# Altium PCB FPGA-DemoShield-PCB.PcbDoc
Units mm, origin at the board's own origin, x right, y up, seen from the top; angles counter-clockwise.
Board outline 55 x 70 mm, 2 copper layers (Top Layer, Bottom Layer); 14 components, 14 nets, 119 pads, 0 vias.
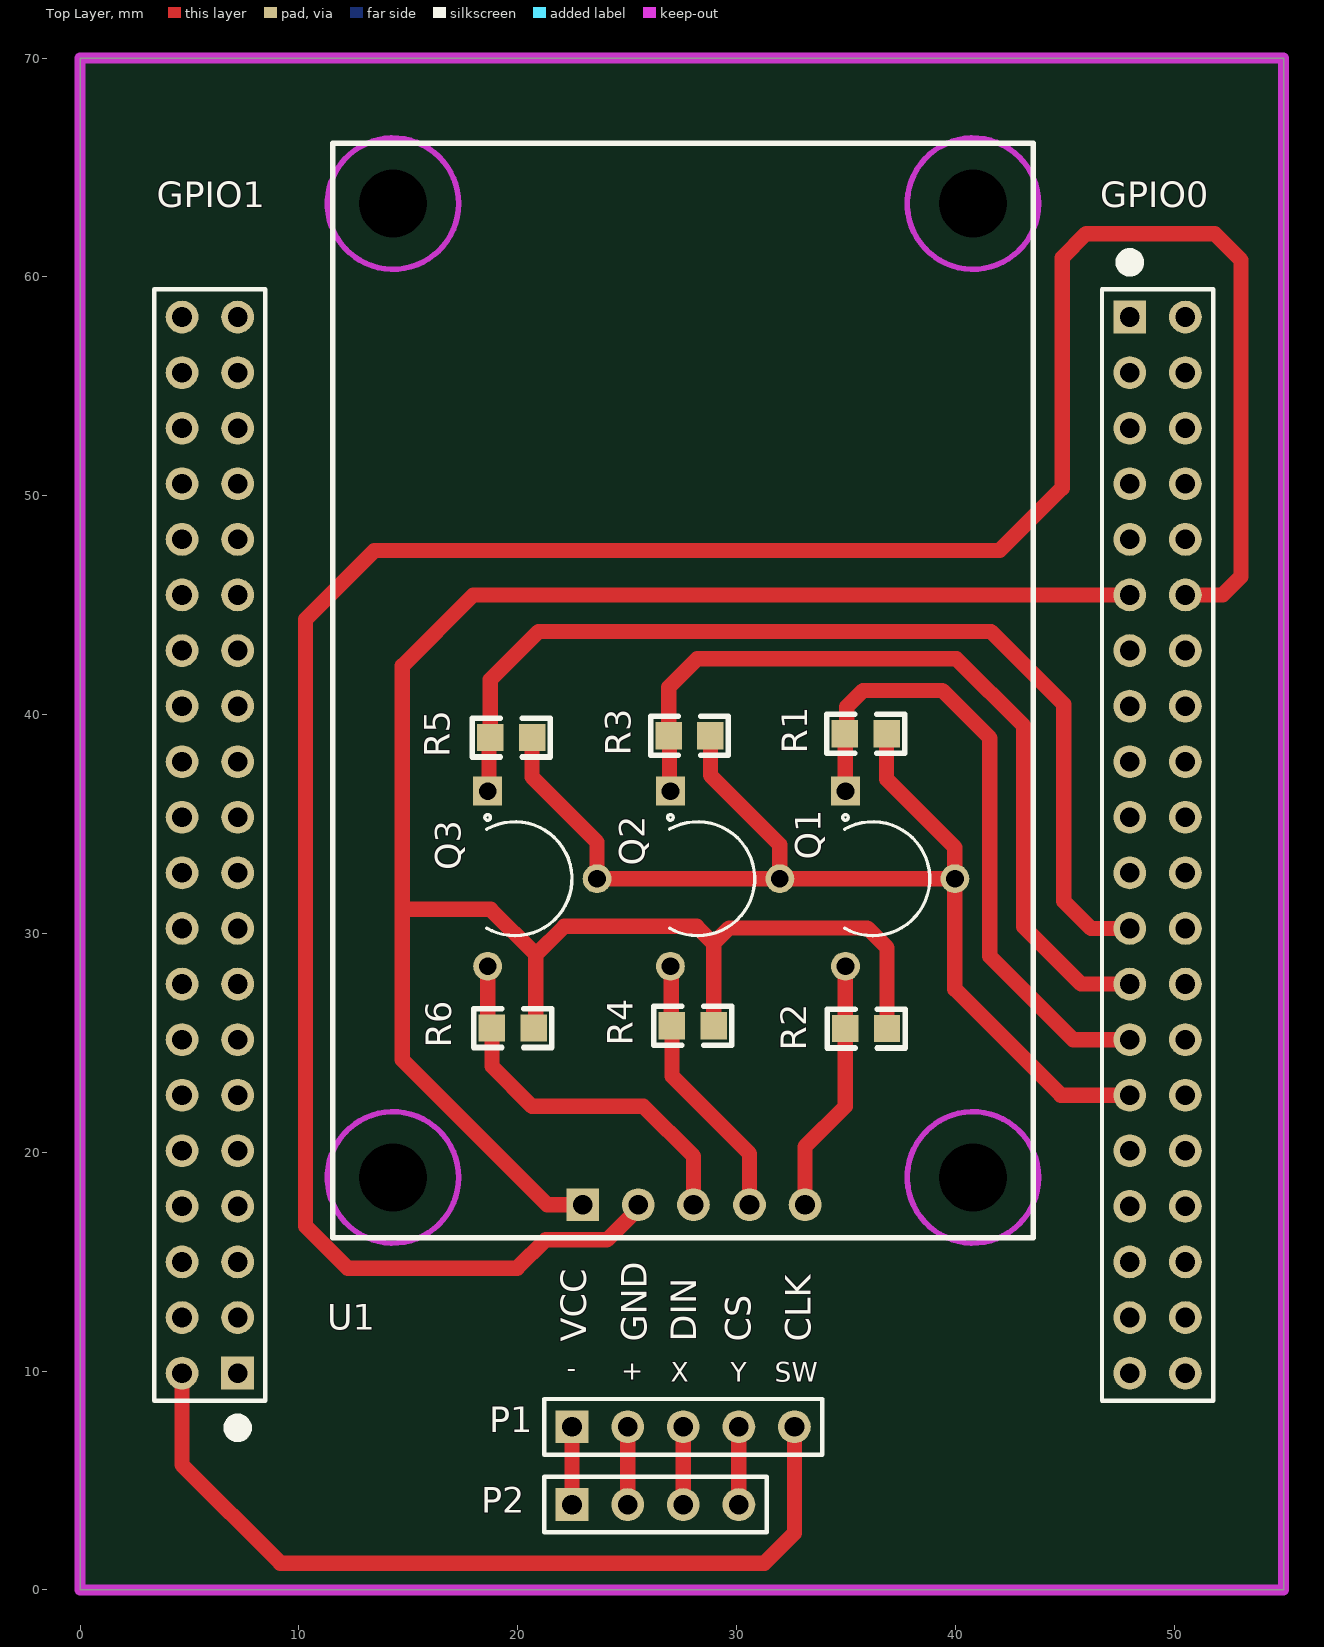
[diagram p0: Top Layer view]
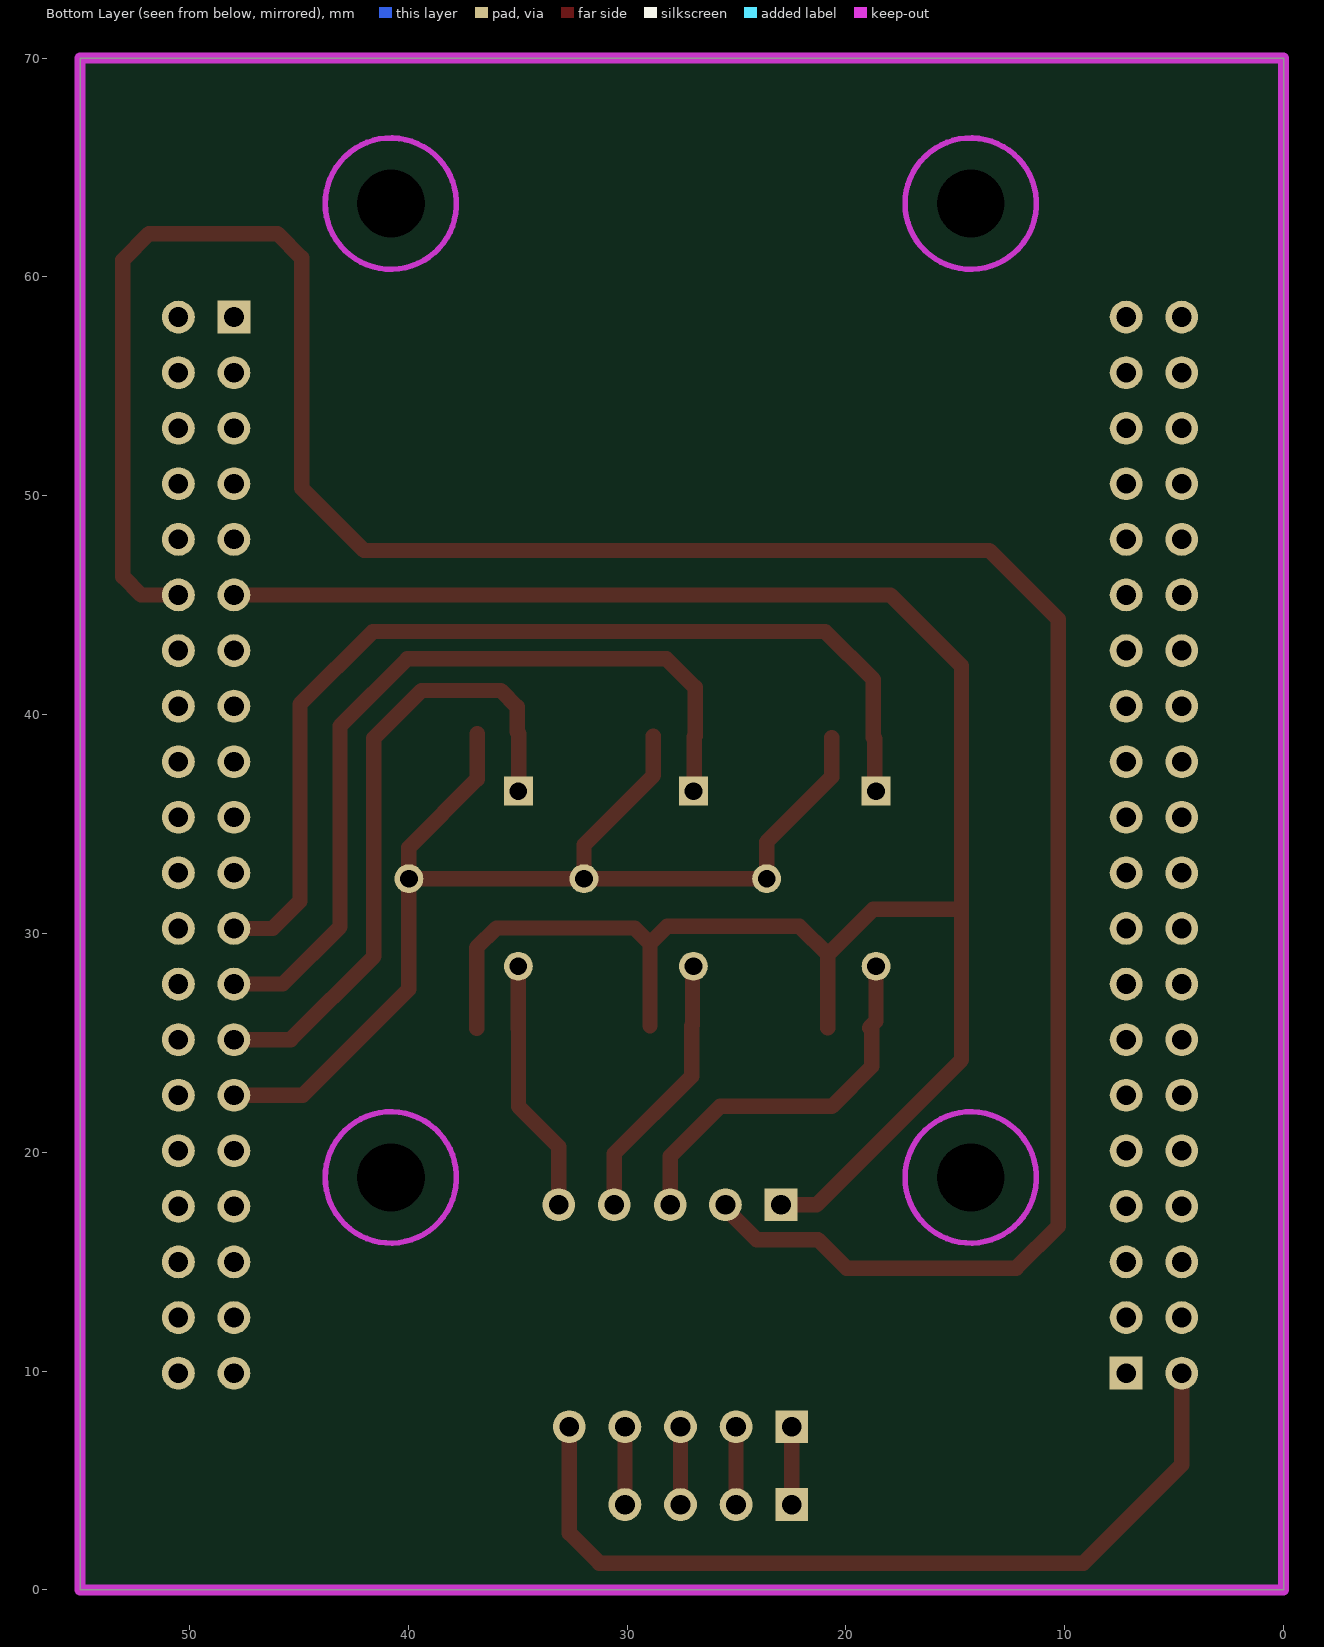
[diagram p1: Bottom Layer view, seen from below]
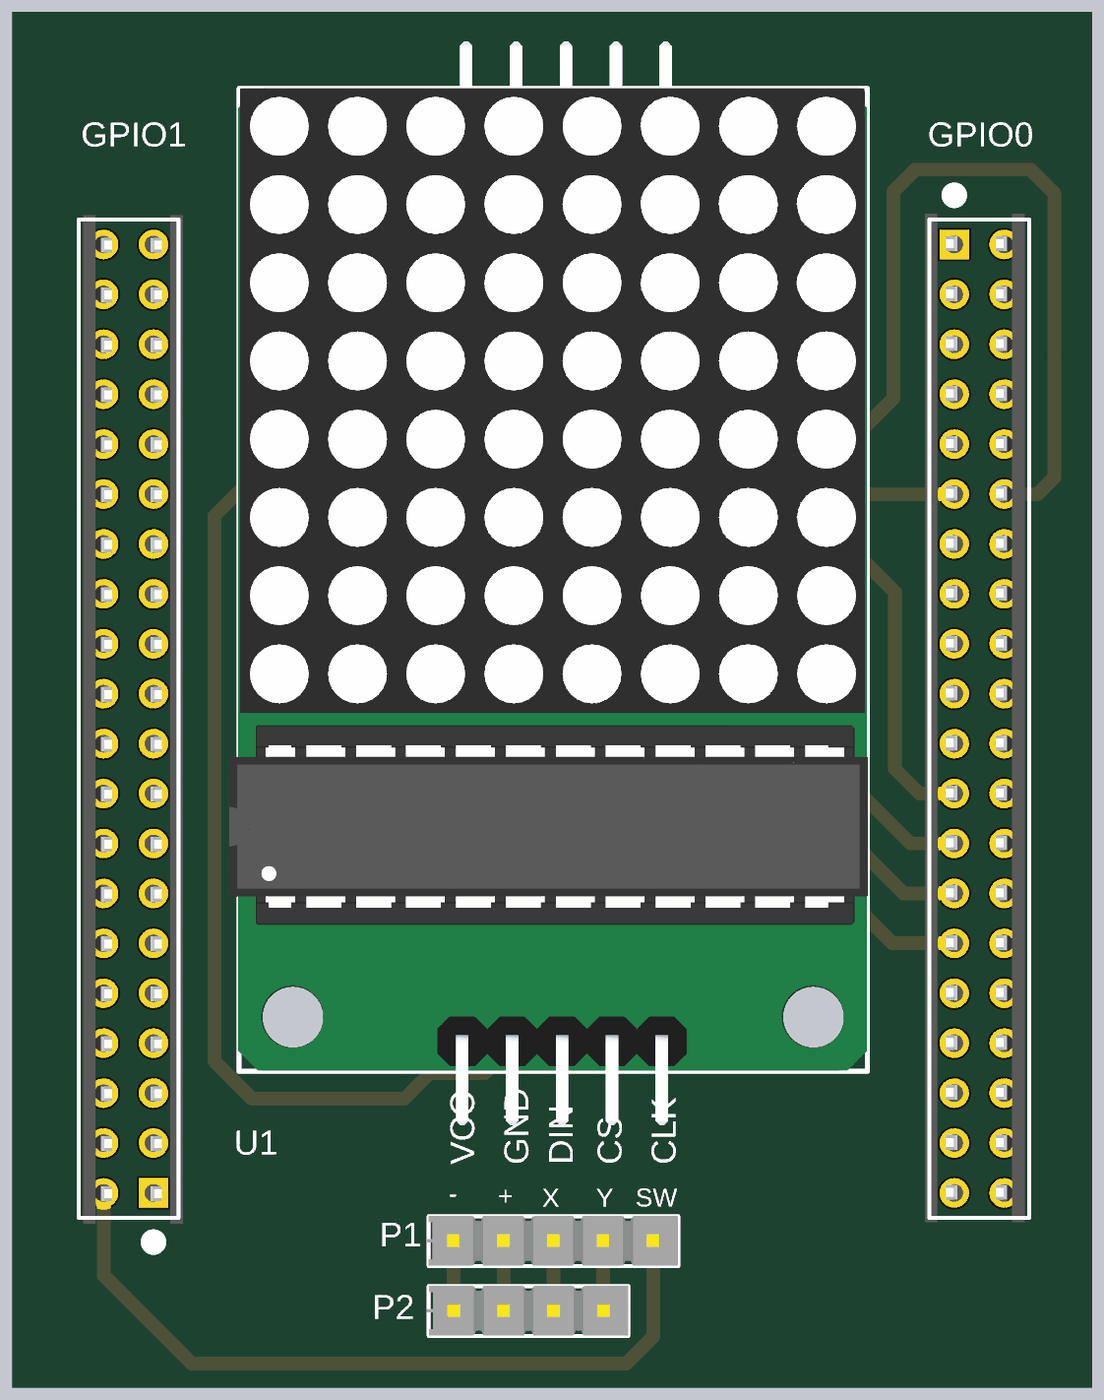
[diagram p2: 3D render of the assembled board from above, using the file's embedded part models]

## Layer stack, top to bottom
Top Solder: solder mask 0.0102, Solder Resist, Dk 3.5
Top Layer: signal copper 0.0356
Dielectric 1: dielectric 0.32, FR-4, Dk 4.8
Bottom Layer: signal copper 0.0356
Bottom Solder: solder mask 0.0102, Solder Resist, Dk 3.5

## Board outline
0,0 55,0 55,70 0,70

## Design rules (kind name [scope] priority, off if disabled: settings)
Clearance [All] p1: gap=0.5 ignorepadtopadclearanceinfootprint=FALSE
HoleSize [All] p1: absolutevalues=TRUE maxlimit=10 minlimit=0.025 maxpercent=80.000 minpercent=20.000
PolygonConnect [All] p1: connectstyle=Relief reliefconductorwidth=0.254 reliefentries=4 polygonreliefangle="90 Angle" airgapwidth=0.254
RoomDefinition FPGA-DemoShield-Schematic [InComponentClass('FPGA-DemoShield-Schematic')] p1: confinementstyle=ConfineIn formatcopy=TRUE lockcomponents=FALSE outline 3.015,2.259 52.14,2.259 52.14,68.759 3.015,68.759
RoutingVias [All] p1: holewidth=0.711 width=1.27 viastyle="Through Hole" minholewidth=0.711 minwidth=1.27 maxholewidth=0.711 maxwidth=1.27
SilkToSolderMaskClearance [IsPad] p1: minsilkscreentomaskgap=0 clearancetoexposedcopper=TRUE
SolderMaskExpansion [All] p1: expansion=0.102 istentingtop=FALSE
Width [All] p1: maxlimit=0.7 minlimit=0.5 preferedwidth=0.7
28 further rules are at their usual default settings.

## Components (designator, comment, footprint, x,y, rotation, side; value= is the part's Value field where it differs from the comment)
GPIO0 "HEADER_FEMALE_20X2" HDR2X20_FEMALE 47.968,58.166 r270 top
GPIO1 "HEADER_FEMALE_20X2" HDR2X20_FEMALE 7.199,9.906 r90 top
P1 "JOYSTICK_MALE_PINS" HDR1X5_MALE 22.483,7.454 r0 top
P2 "FPGA_ANALOG_PINS" HDR1X4_MALE 22.483,3.898 r0 top
Q1 "2N7000" 2N7000-TO-92 34.975,32.5 r270 top
Q2 "2N7000" 2N7000-TO-92 26.975,32.5 r270 top
Q3 "2N7000" 2N7000-TO-92 18.625,32.5 r270 top
R1 "RES_1k_0805" RES_0805 35.9,39.125 r0 top value=1kΩ
R2 "RES_1k_0805" RES_0805 35.92,25.654 r0 top value=1kΩ
R3 "RES_1k_0805" RES_0805 27.85,39.025 r0 top value=1kΩ
R4 "RES_1k_0805" RES_0805 28.001,25.779 r0 top value=1kΩ
R5 "RES_1k_0805" RES_0805 19.7,38.95 r0 top value=1kΩ
R6 "RES_1k_0805" RES_0805 19.775,25.675 r0 top value=1kΩ
U1 "MAX7219_LEDMatrix" LED_MATRIX 40.8,18.85 r90 top

## Footprints (in the part's own frame and the unit in brackets; to place one, negate y for a bottom-side part, rotate by r counter-clockwise, add the part's x,y. Pads: shape width x height; smd on the part's side, far side on the other; paste and mask are expansions set on the pad)
2N7000-TO-92 [mil]
  rect 52x52 hole 32 mask+0: 1(-157.48,0)
  round 52 hole 32 mask+0: 2(0,196.85) 3(157.48,0)
  silkscreen extent -115,-5 102,152, body extent -97,-12 97,147, height 194
HDR1X4_MALE [mm] "Connector; Header; 4 Position"
  rect 1.5x1.5 hole 0.9: 1(0,0)
  round 1.5 hole 0.9: 2(2.54,0) 3(5.08,0) 4(7.62,0)
  silkscreen extent -1.27,-1.27 8.89,1.27, body extent -1.39,-1.25 8.89,1.29, height 5.21
HDR1X5_MALE [mm] "Connector; Header; 5 Position"
  rect 1.5x1.5 hole 0.9: 1(0,0)
  round 1.5 hole 0.9: 2(2.54,0) 3(5.08,0) 4(7.62,0) 5(10.16,0)
  silkscreen extent -1.27,-1.27 11.43,1.27, body extent -1.41,-1.25 11.41,1.29, height 5.21
HDR2X20_FEMALE [mm] "Connector; Header; 20x2 Position"
  rect 1.5x1.5 hole 0.9: 1(0,0)
  round 1.5 hole 0.9: 2(0,2.54) 3(2.54,0) 4(2.54,2.54) 5(5.08,0) 6(5.08,2.54) 7(7.62,0) 8(7.62,2.54) 9(10.16,0) 10(10.16,2.54) 11(12.7,0) 12(12.7,2.54) 13(15.24,0) 14(15.24,2.54) 15(17.78,0) 16(17.78,2.54) 17(20.32,0) 18(20.32,2.54) 19(22.86,0) 20(22.86,2.54) 21(25.4,0) 22(25.4,2.54) 23(27.94,0) 24(27.94,2.54) 25(30.48,0) 26(30.48,2.54) 27(33.02,0) 28(33.02,2.54) 29(35.56,0) 30(35.56,2.54) 31(38.1,0) 32(38.1,2.54) 33(40.64,0) 34(40.64,2.54) 35(43.18,0) 36(43.18,2.54) 37(45.72,0) 38(45.72,2.54) 39(48.26,0) 40(48.26,2.54)
  silkscreen extent -2.75,-1.27 49.53,3.81, body extent -1.56,-1.5 49.75,3.58, height 3.2
LED_MATRIX [mm] "Connector; Header; 5 Position"
  rect 1.5x1.5 hole 0.9: 1(-1.25,17.83)
  round 1.5 hole 0.9: 2(-1.25,15.29) 3(-1.25,12.77) 4(-1.25,10.21) 5(-1.25,7.67)
  round 0 hole 3.1 unplated: 10(0,26.5) 10(0,0) 10(44.5,0) 10(44.5,26.5)
  Keep-Out Layer circle w0.254: c44.5,0 r3
  Keep-Out Layer circle w0.254: c44.5,26.5 r3
  Keep-Out Layer circle w0.254: c0,26.5 r3
  Keep-Out Layer circle w0.254: c0,0 r3
  silkscreen extent -2.75,-2.75 47.25,29.25, body extent -5.5,-2.76 49.64,29.76, height 18.68
RES_0805 [mm]
  rect 1.209x1.251 smd: 1(-0.954,0) 2(0.954,0)
  silkscreen extent -1.78,-0.89 1.78,0.89, body extent -1,-0.6 1,0.6, height 0.71

## Part data
GPIO0 GPIO1: "Header, 20-Pin, Dual row"
P1: "Header, 5-Pin"
P2: "Header, 4-Pin"
Q1 Q2 Q3: "MOSFET N-CH 60V 350MA TO92-3", Package=TO-92, MP=2N7000
R1 R2 R3 R4 R5 R6: "1k RES 0805", LatestRevisionDate=17-Jul-2002, LatestRevisionNote="Re-released for DXP Platform.", PackageDescription="Axial Device, Thru-Hole; 2 Leads; 0.3 in Pin Spacing", PackageReference=AXIAL-0.3, Published=8-Jun-2000, Publisher="Altium Limited"
U1: "LED MATRIX"

## Nets (pads, with @x,y where several pads share a name; then routed paths per layer and width w, separated by ;. In a path a pad name is that pad's centre, name@x,y a point inside that pad or via, vN(x,y) a via of type N, cw(c..) or ccw(c..) an arc to the next point about the centre after c; other vN are vias at no path point)
+3.3V: GPIO0.29 Q1.2 Q2.2 Q3.2 R1.2 R3.2 R5.2 | length 55
  Top Layer w0.7: R5.2 20.654,37.146 23.625,34.175 Q3.2 Q2.2 ; R3.2 28.804,37.221 31.975,34.05 Q2.2 ; R1.2 36.854,37.046 39.975,33.925 Q1.2 ; GPIO0.29@48.093,22.606 44.819,22.606 39.975,27.45 Q1.2 ; Q2.2 Q1.2
+5V: GPIO0.11 R2.2 R4.2 R6.2 U1.1 | length 99
  Top Layer w0.7: R6.2@20.829,25.675 20.829,29.029 ; U1.1 21.35,17.6 14.725,24.225 14.725,31.1 ; R4.2 28.955,29.545 ; R2.2 36.874,29.351 35.975,30.25 29.66,30.25 28.955,29.545 ; GPIO0.11@48.093,45.466 17.966,45.466 14.725,42.225 14.725,31.1 ; 14.725,31.1 18.759,31.1 20.829,29.029 ; 20.829,29.029 22.125,30.325 28.175,30.325 28.955,29.545
AGND: P1.1 P2.1 | length 3.6
  Top Layer w0.7: P2.1 P1.1
AVCC: P1.2 P2.2 | length 3.6
  Top Layer w0.7: P2.2 P1.2
CLK_3.3V: GPIO0.27 Q1.1 R1.1 | length 29.7
  Top Layer w0.7: Q1.1 34.96,36.515 34.96,39.11 R1.1 35.03,39.21 35.03,40.355 35.775,41.1 39.4,41.1 41.575,38.925 41.575,28.95 45.379,25.146 GPIO0.27@48.093,25.146
CLK_5V: Q1.3 R2.1 U1.5 | length 11.7
  Top Layer w0.7: U1.5 33.13,20.255 34.966,22.091 R2.1 34.97,25.659 34.97,28.495 Q1.3
CS_3.3V: GPIO0.25 Q2.1 R3.1 | length 38
  Top Layer w0.5: Q2.1@26.935,36.54 Q2.1
  Top Layer w0.7: Q2.1@26.935,36.54 26.935,38.985 R3.1 26.896,41.246 28.2,42.55 40.05,42.55 43.125,39.475 43.125,30.3 45.739,27.686 GPIO0.25@48.093,27.686
CS_5V: Q2.3 R4.1 U1.4 | length 12.4
  Top Layer w0.5: Q2.3 Q2.3@27.011,28.464 ; R4.1@27.011,25.815 R4.1
  Top Layer w0.7: R4.1@27.011,25.815 Q2.3@27.011,28.464 ; R4.1 27.046,23.479 30.59,19.935 U1.4
DIN_3.3V: GPIO0.23 Q3.1 R5.1 | length 46.3
  Top Layer w0.7: Q3.1 18.685,36.56 18.685,38.89 R5.1 18.75,38.954 18.75,41.6 20.95,43.8 41.625,43.8 44.95,40.475 44.95,31.475 46.199,30.226 GPIO0.23@48.093,30.226
DIN_5V: Q3.3 R6.1 U1.3 | length 17.8
  Top Layer w0.7: Q3.3 18.625,25.992 18.921,25.696 R6.1@18.921,25.675 ; R6.1 18.821,23.929 20.65,22.1 25.75,22.1 28.03,19.82 U1.3
FPGA_Analog0: P1.3 P2.3 | length 3.6
  Top Layer w0.7: P2.3 P1.3
FPGA_Analog1: P1.4 P2.4 | length 3.6
  Top Layer w0.7: P2.4 P1.4
GND: GPIO0.12 U1.2 | length 119
  Top Layer w0.7: U1.2 25.51,17.438 24.072,16 21.868,16 21.861,16.007 21.282,16.007 19.975,14.7 12.225,14.7 10.3,16.625 10.3,44.35 13.448,47.498 42.023,47.498 44.875,50.35 44.875,60.875 45.975,61.975 51.85,61.975 53.05,60.775 53.05,46.3 52.216,45.466 GPIO0.12@50.633,45.466
SW_3.3V: GPIO1.2 P1.5 | length 39.5
  Top Layer w0.7: GPIO1.2 4.659,5.716 9.15,1.225 31.275,1.225 32.643,2.593 P1.5
pads on no net: GPIO0.1 GPIO0.2 GPIO0.3 GPIO0.4 GPIO0.5 GPIO0.6 GPIO0.7 GPIO0.8 GPIO0.9 GPIO0.10 GPIO0.13 GPIO0.14 GPIO0.15 GPIO0.16 GPIO0.17 GPIO0.18 GPIO0.19 GPIO0.20 GPIO0.21 GPIO0.22 GPIO0.24 GPIO0.26 GPIO0.28 GPIO0.30 GPIO0.31 GPIO0.32 GPIO0.33 GPIO0.34 GPIO0.35 GPIO0.36 GPIO0.37 GPIO0.38 GPIO0.39 GPIO0.40 GPIO1.1 GPIO1.3 GPIO1.4 GPIO1.5 GPIO1.6 GPIO1.7 GPIO1.8 GPIO1.9 GPIO1.10 GPIO1.11 GPIO1.12 GPIO1.13 GPIO1.14 GPIO1.15 GPIO1.16 GPIO1.17 GPIO1.18 GPIO1.19 GPIO1.20 GPIO1.21 GPIO1.22 GPIO1.23 GPIO1.24 GPIO1.25 GPIO1.26 GPIO1.27 GPIO1.28 GPIO1.29 GPIO1.30 GPIO1.31 GPIO1.32 GPIO1.33 GPIO1.34 GPIO1.35 GPIO1.36 GPIO1.37 GPIO1.38 GPIO1.39 GPIO1.40 U1.10

## Keep-outs
Keep-Out Layer:
  the board outline again, w0.5

## Text inside footprints (layer, text, board x,y; h text height)
P1: Top Overlay "SW" at 31.733,9.22 h1.5; Top Overlay "Y" at 29.734,9.204 h1.5; Top Overlay "X" at 26.983,9.204 h1.5; Top Overlay "+" at 24.733,9.299 h1.5; Top Overlay "-" at 22.233,9.416 h1.5
U1: Top Overlay "VCC" at 23.529,11.351 h2 r90; Top Overlay "GND" at 26.279,11.35 h2 r90; Top Overlay "DIN" at 28.55,11.35 h2 r90; Top Overlay "CS" at 31.029,11.35 h2 r90; Top Overlay "CLK" at 33.779,11.35 h2 r90